# Altium PCB PCB_Pro.PcbDoc
Units mm, origin at the board's own origin, x right, y up, seen from the top; angles counter-clockwise.
Board outline 48.13 x 42.8 mm, 2 copper layers (Top Layer, Bottom Layer); 19 components, 11 nets, 56 pads, 0 vias.
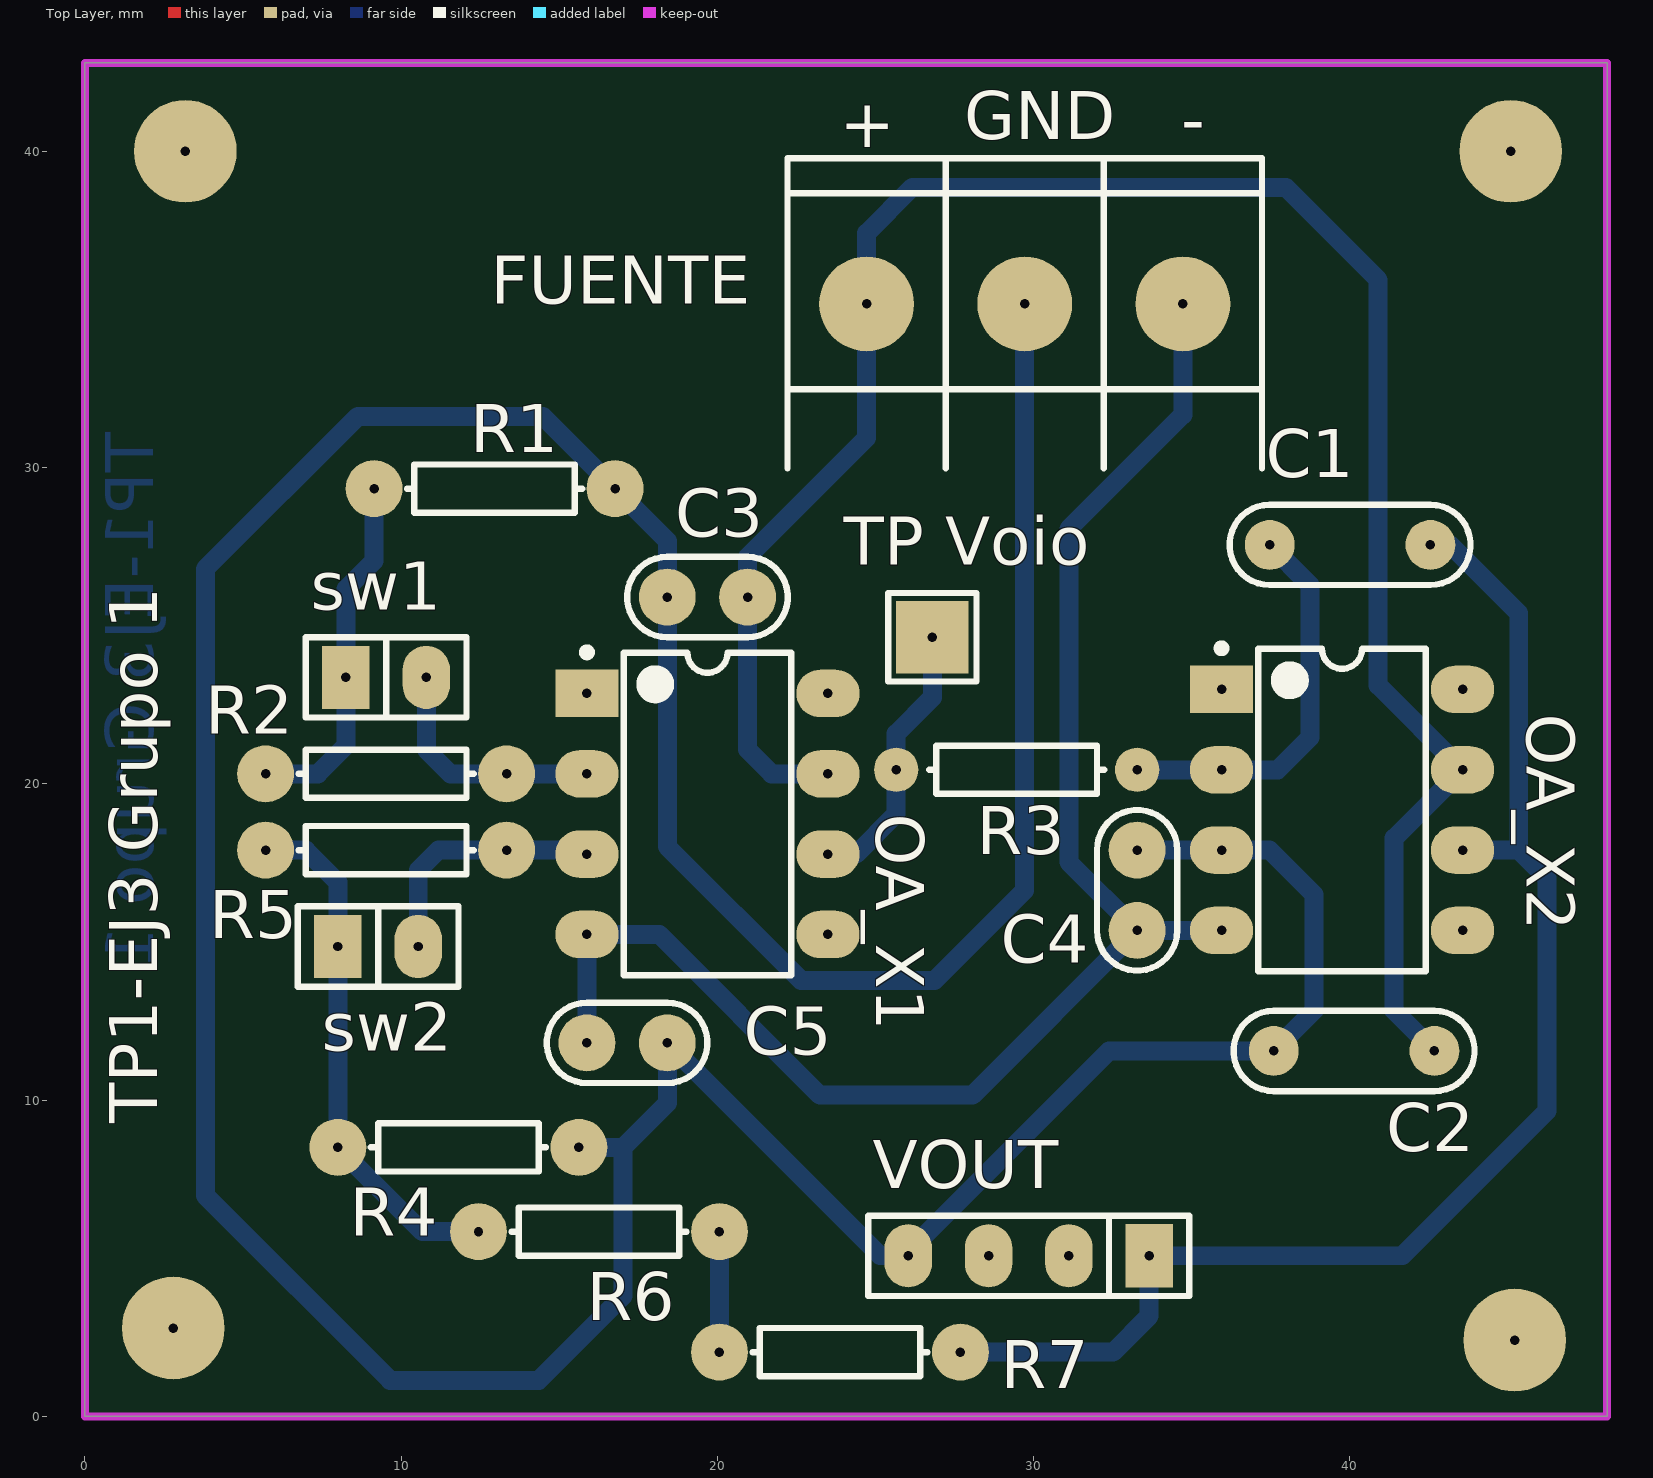
[diagram p0: Top Layer view]
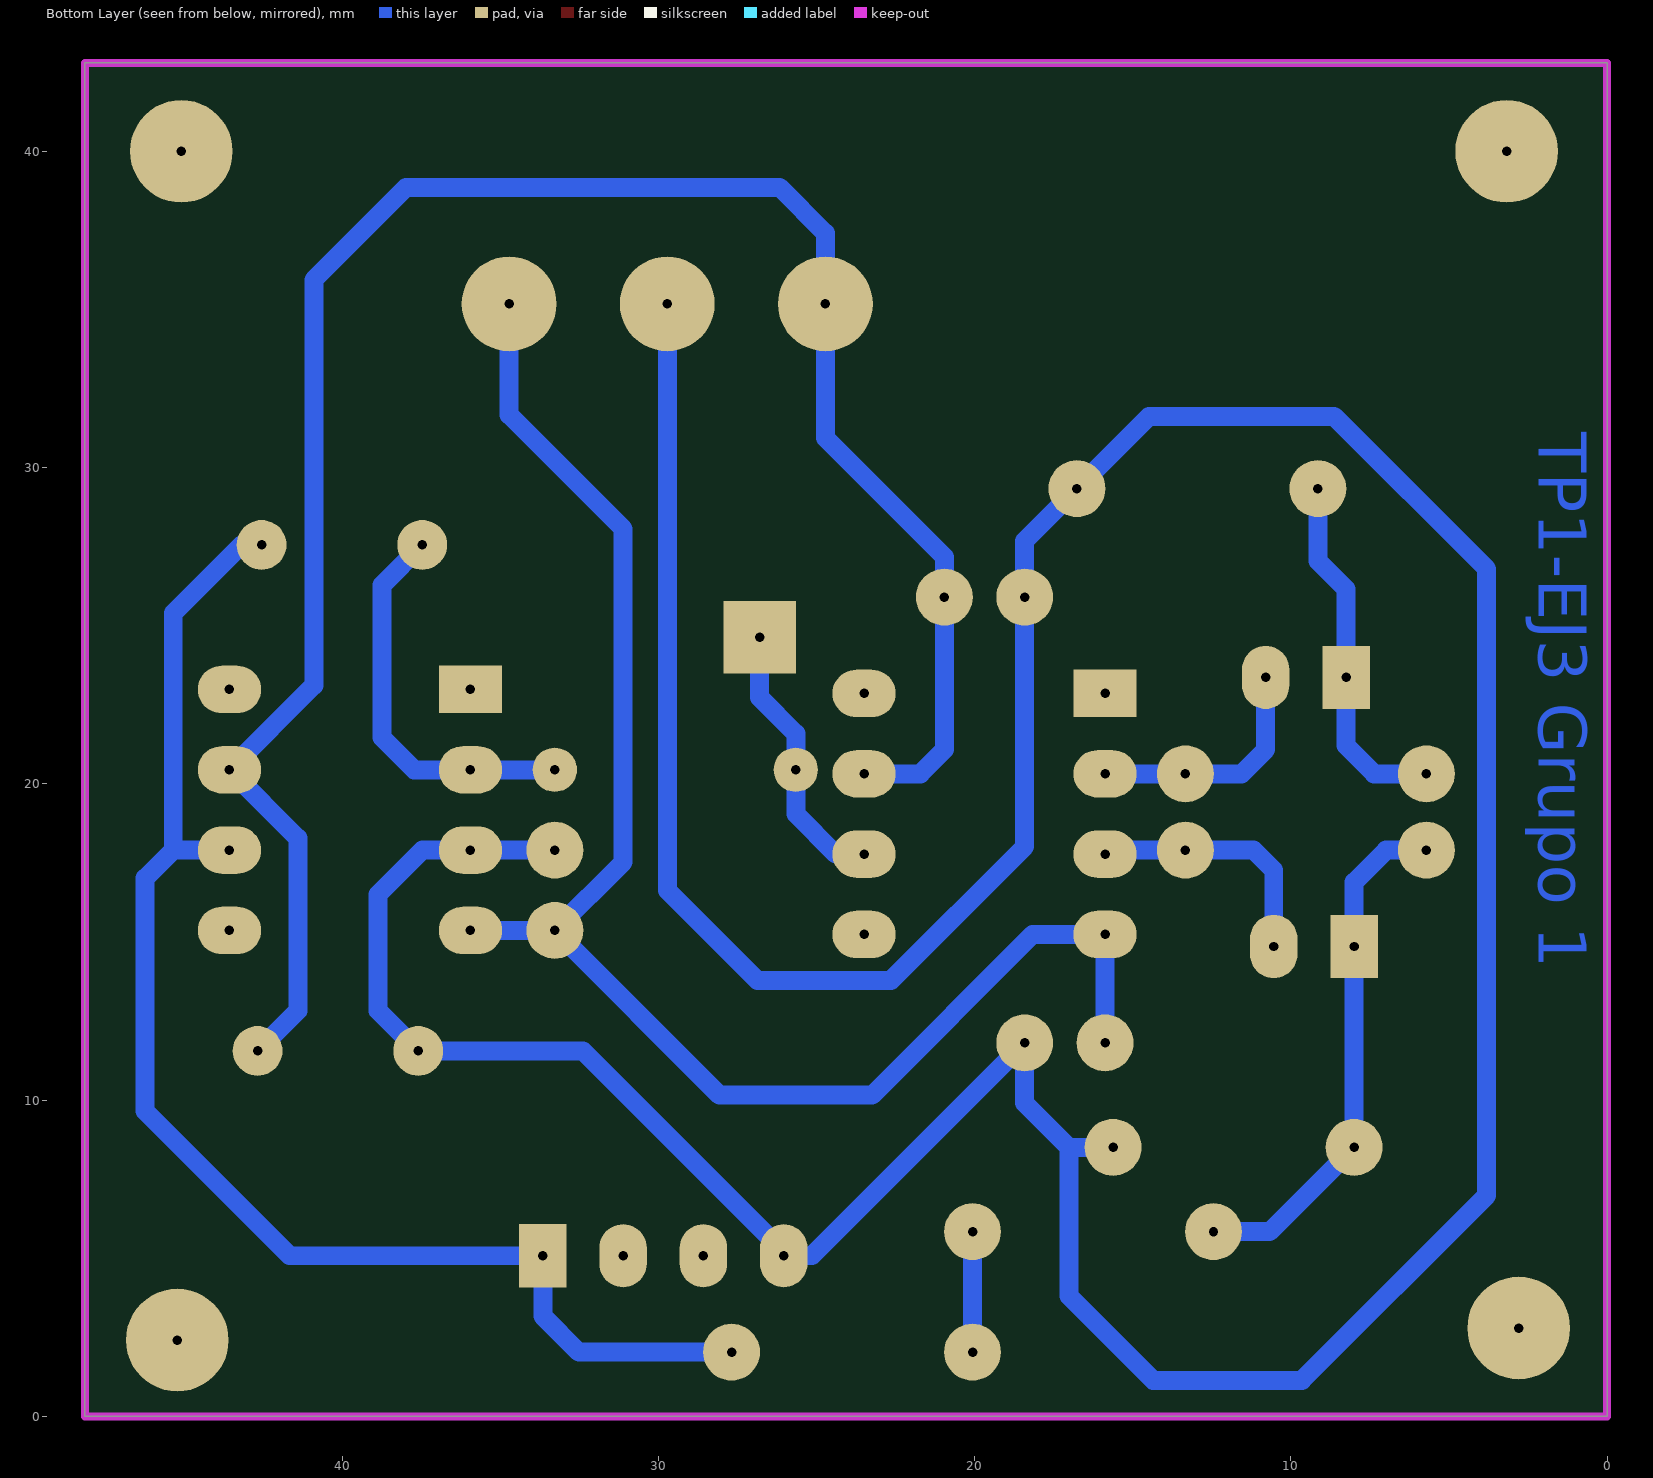
[diagram p1: Bottom Layer view, seen from below]

## Layer stack, top to bottom
Top Solder: solder mask 0.0102, Solder Resist, Dk 3.5
Top Layer: signal copper 0.0356
Dielectric 1: dielectric 0.32, FR-4, Dk 4.8
Bottom Layer: signal copper 0.0356
Bottom Solder: solder mask 0.0102, Solder Resist, Dk 3.5

## Board outline
0,0 48.133,0 48.133,42.799 0,42.799

## Design rules (kind name [scope] priority, off if disabled: settings)
Clearance [All] p1: gap=0.4 ignorepadtopadclearanceinfootprint=FALSE
PolygonConnect [All] p1: connectstyle=Relief reliefconductorwidth=0.254 reliefentries=4 polygonreliefangle="90 Angle" airgapwidth=0.254
RoutingVias [All] p1: holewidth=0.711 width=1.27 viastyle="Through Hole" minholewidth=0.711 minwidth=1.27 maxholewidth=0.711 maxwidth=1.27
SolderMaskExpansion [All] p1: expansion=0.102
Width [All] p1: maxlimit=0.9 minlimit=0.6 preferedwidth=0.6
30 further rules are at their usual default settings.

## Components (designator, comment, footprint, x,y, rotation, side; value= is the part's Value field where it differs from the comment)
C1 "100n" CAP200 40.005,27.559 r0 top
C2 "100n" CAP200 40.132,11.557 r180 top net-tie
C3 "100n" CAP100 19.685,25.908 r180 top
C4 "100n" CAP100 33.274,16.637 r270 top
C5 "100n" CAP100 17.145,11.811 r180 top
FUENTE "BORNERA 3" BORNERA3 29.718,35.179 r270 top
OA_X1 "TL081IP" TI-P8 19.685,19.05 r0 top
OA_X2 "TL081IP" TI-P8 39.751,19.177 r0 top
R1 "" AXIAL-0.3#1 12.954,29.337 r180 top value=10
R2 "" AXIAL-0.3#1 9.525,20.32 r0 top value=1K
R3 "" AXIAL-0.3#2 29.464,20.447 r0 top value=100K
R4 "" AXIAL-0.3#1 11.811,8.509 r180 top value=10
R5 "" AXIAL-0.3#1 9.525,17.907 r0 top value=1K
R6 "" AXIAL-0.3#1 16.256,5.842 r0 top value=1.5K
R7 "" AXIAL-0.3#1 23.876,2.032 r0 top value=1.5K
sw1 "CON2" SIP2 9.525,23.368 r0 top
sw2 "CON2" SIP2 9.271,14.859 r0 top
"TP Voio" "TP" TPTH 26.797,24.638 r90 top
VOUT "" SIP4 29.845,5.08 r180 top

## Footprints (in the part's own frame and the unit in brackets; to place one, negate y for a bottom-side part, rotate by r counter-clockwise, add the part's x,y. Pads: shape width x height; smd on the part's side, far side on the other; paste and mask are expansions set on the pad)
AXIAL-0.3#1 [mm] "Axial Device, Thru-Hole; 2 Leads; 0.3 in Pin Spacing"
  round 1.8 hole 0.3: 1(-3.81,0) 2(3.81,0)
  silkscreen extent -2.77,-0.76 2.77,0.76
AXIAL-0.3#2 [mm] "Axial Device, Thru-Hole; 2 Leads; 0.3 in Pin Spacing"
  round 1.4 hole 0.3: 1(-3.81,0) 2(3.81,0)
  silkscreen extent -2.77,-0.76 2.77,0.76
BORNERA3 [mm] "Bornera con Tornillos 5mm separación"
  round 3 hole 0.3: 1(0,5) 2(0,0) 3(0,-5)
  silkscreen extent -4.6,-7.5 5.2,7.5, body extent -3.76,-7.39 3.94,8.11, height 10.05
CAP100 [mm]
  round 1.8 hole 0.3: 1(-1.27,0) 2(1.27,0)
  silkscreen extent -2.54,-1.27 2.54,1.27, body extent -2.92,-0.84 2.92,0.86, height 6.12
CAP200 [mil]
  round 62 hole 11.81: 1(-100,0) 2(100,0)
  silkscreen extent -150,-50 150,50, body extent -110,-46 110,44, height 246
SIP2 [mm]
  rect 1.5x2 hole 0.3 unplated mask+0.102: 1(-1.27,0)
  oval 1.5x2 hole 0.3 unplated mask+0.102: 2(1.27,0)
  silkscreen extent -2.54,-1.27 2.54,1.27
SIP4 [mm]
  rect 1.5x2 hole 0.3 unplated mask+0.102: 1(-3.81,0)
  oval 1.5x2 hole 0.3 unplated mask+0.102: 2(-1.27,0) 3(1.27,0) 4(3.81,0)
  silkscreen extent -5.08,-1.27 5.08,1.27, body extent -5.08,-1.27 5.08,1.27, height 8.38
TI-P8 [mm] "DIP, 8-Leads, Body 9.59x6.35mm, Pitch 2.54mm"
  rect 2x1.5 hole 0.3 unplated mask+0.102: 1(-3.81,3.81)
  oval 2x1.5 hole 0.3 unplated mask+0.102: 2(-3.81,1.27) 3(-3.81,-1.27) 4(-3.81,-3.81) 5(3.81,-3.81) 6(3.81,-1.27) 7(3.81,1.27) 8(3.81,3.81)
  silkscreen extent -3.93,-5.1 2.65,5.23, body extent -3.95,-5.07 3.95,5.07, height 5.08
TPTH [mm]
  rect 2.3x2.3 hole 0.3: 1(0,0)
  silkscreen extent -1.4,-1.4 1.4,1.4, body extent -1.27,-1.27 1.27,1.27, height 6.04

## Part data
C1 C2 C3 C4 C5: library part CAP
OA_X1 OA_X2: "JFET-Input Operational Amplifier, 7 to 36 V, -40 to 85 degC, 8-pin DIP (P8), Pb-Free (RoHS)", Manufacturer="Texas Instruments", Rating=Military, Supplier Part Number 1=TL081IP-ND, Total Supply Voltage(Max)(+5V is 5, +/-5V is 10)=36, Total Supply Voltage(Min)(+5V is 5, +/-5V is 10)=7, CMRR(Min)(dB)=75, Code_JEDEC=MS-001, ComponentLink1Description="Manufacturer URL", ComponentLink1URL=http://www.ti.com/, ComponentLink2Description=Datasheet, ComponentLink2URL=http://www.ti.com/lit/ds/symlink/tl081.pdf, ComponentLink3Description="Package Specification", ComponentLink3URL=http://www.ti.com/litv/pdf/mpdi001b, DatasheetVersion=SLOS081G, Eco-Plan="Green (RoHS & no Sb/Br)", GBW(Typ)(MHz)=3, IIB(Max)(pA)=400, Iq per channel(Max)(mA)=2.8, Mounting Technology="Through Hole", Number of Channels=1, Offset Drift(Typ)(uV/C)=18, PackageDescription="8-Pin Plastic In-Line, Body 9.59 x 6.35 mm, Pitch 2.54 mm", PackageReference=P8, PackageVersion="4040082/E, 04/2010", PartNumber=TL081IP, Slew Rate(Typ)(V/us)=13, Sub Family="General Purpose Amplifier, High Supply Voltage Amplifier (>=30V)", Supplier 1=Digi-Key, Supplier 2=Newark, Supplier 3=Mouser, Supplier Part Number 2=31C2501, Supplier Part Number 3=595-TL081IP, Vio (25C)(Max)(mV)=15, Vn at 1kHz(Typ)(nV/rtHz)=18
R1 R2 R3 R4 R5 R6 R7: library part Res1, "Resistor", LatestRevisionDate=17-Jul-2002, LatestRevisionNote="Re-released for DXP Platform.", PackageDescription="Axial Device, Thru-Hole; 2 Leads; 0.3 in Pin Spacing", PackageReference=AXIAL-0.3, Published=8-Jun-2000, Publisher="Altium Limited"
VOUT: library part CON4

## Free pads (board coordinates)
  round 3.25 hole 0.3: 2(2.794,2.794) 2(3.175,40.005) 2(45.085,40.005) 2(45.212,2.413)

## Nets (pads, with @x,y where several pads share a name; then routed paths per layer and width w, separated by ;. In a path a pad name is that pad's centre, name@x,y a point inside that pad or via, vN(x,y) a via of type N, cw(c..) or ccw(c..) an arc to the next point about the centre after c; other vN are vias at no path point)
+VCC: C2.1 C3.1 FUENTE.3 OA_X1.7 OA_X2.7 | length 65.6
  Bottom Layer w0.6: OA_X1.7 21.717,20.32 20.955,21.082 C3.1 20.955,27.178 24.718,30.941 FUENTE.3 24.718,37.418 26.162,38.862 37.973,38.862 40.894,35.941 40.894,23.114 OA_X2.7 41.402,18.288 41.402,12.827 C2.1
-VCC: C4.2 C5.2 FUENTE.1 OA_X1.4 OA_X2.4 | length 50
  Bottom Layer w0.6: C5.2 OA_X1.4 18.161,15.24 23.241,10.16 28.067,10.16 C4.2 ; FUENTE.1 34.718,31.67 31.115,28.067 31.115,17.526 C4.2 ; OA_X2.4 C4.2
GND: C2.2 C3.2 C4.1 C5.1 FUENTE.2 OA_X2.3 R1.1 R4.1 VOUT.4 | length 143.5
  Bottom Layer w0.6: R4.1 17.018,8.509 ; VOUT.4@25.971,5.143 32.385,11.557 C2.2 38.862,12.827 38.862,16.51 37.465,17.907 OA_X2.3 C4.1 ; VOUT.4 25.146,5.08 C5.1 18.415,9.906 17.018,8.509 ; FUENTE.2 29.718,16.637 26.871,13.79 22.644,13.79 18.415,18.019 C3.2 18.415,27.686 R1.1 14.478,31.623 8.636,31.623 3.81,26.797 3.81,6.985 9.652,1.143 14.351,1.143 17.018,3.81 17.018,8.509
NetC1_1: C1.1 OA_X2.2 R3.2 | length 12.5
  Bottom Layer w0.6: R3.2 OA_X2.2 37.719,20.447 38.735,21.463 38.735,26.289 C1.1
NetOA_X1_2: OA_X1.2 R2.2 sw1.2 | length 7.7
  Bottom Layer w0.6: sw1.2 10.795,21.082 11.557,20.32 R2.2 OA_X1.2
NetOA_X1_3: OA_X1.3 R5.2 sw2.2 | length 8.1
  Bottom Layer w0.6: sw2.2 10.541,17.272 11.176,17.907 R5.2 15.748,17.907 OA_X1.3
NetOA_X1_6: "TP Voio.1" OA_X1.6 R3.1 | length 8.7
  Bottom Layer w0.6: OA_X1.6 24.384,17.78 25.654,19.05 R3.1 25.654,21.59 26.797,22.733 26.797,24.638
NetR1_2: R1.2 R2.1 sw1.1 | length 11.4
  Bottom Layer w0.6: R2.1 7.366,20.32 8.255,21.209 sw1.1 8.255,26.162 9.144,27.051 R1.2
NetR4_2: R4.2 R5.1 R6.1 sw2.1 | length 16.6
  Bottom Layer w0.6: R5.1 6.985,17.907 8.001,16.891 sw2.1 R4.2 10.668,5.842 R6.1
NetR6_2: R6.2 R7.1 | length 3.8
  Bottom Layer w0.6: R7.1 R6.2
VOUT: C1.2 OA_X2.6 R7.2 VOUT.1 | length 44.4
  Bottom Layer w0.6: R7.2 32.512,2.032 33.655,3.175 VOUT.1 41.656,5.08 46.228,9.652 46.228,17.018 45.339,17.907 ; C1.2 43.18,27.559 45.339,25.4 45.339,17.907 ; OA_X2.6 45.339,17.907
pads on no net: OA_X1.1 OA_X1.5 OA_X1.8 OA_X2.1 OA_X2.5 OA_X2.8 VOUT.2 VOUT.3

## Keep-outs
Keep-Out Layer:
  the board outline again, w0.254

## Other copper
Bottom Layer:
  text "TP1-EJ3 Grupo 1" at 2.159,31.115 h1.52 r90

## Silkscreen, mask and mechanical layers (free items; w line width, h text height)
Top Overlay:
  text "GND" at 27.813,40.386 h1.52
  text "-" at 34.671,40.259 h1.52
  text "+" at 23.876,40.132 h1.52
  text "TP1-EJ3 Grupo 1" at 2.286,9.271 h1.52 r90